# EAGLE board 555_led_pcb (EAGLE 7.2.0)
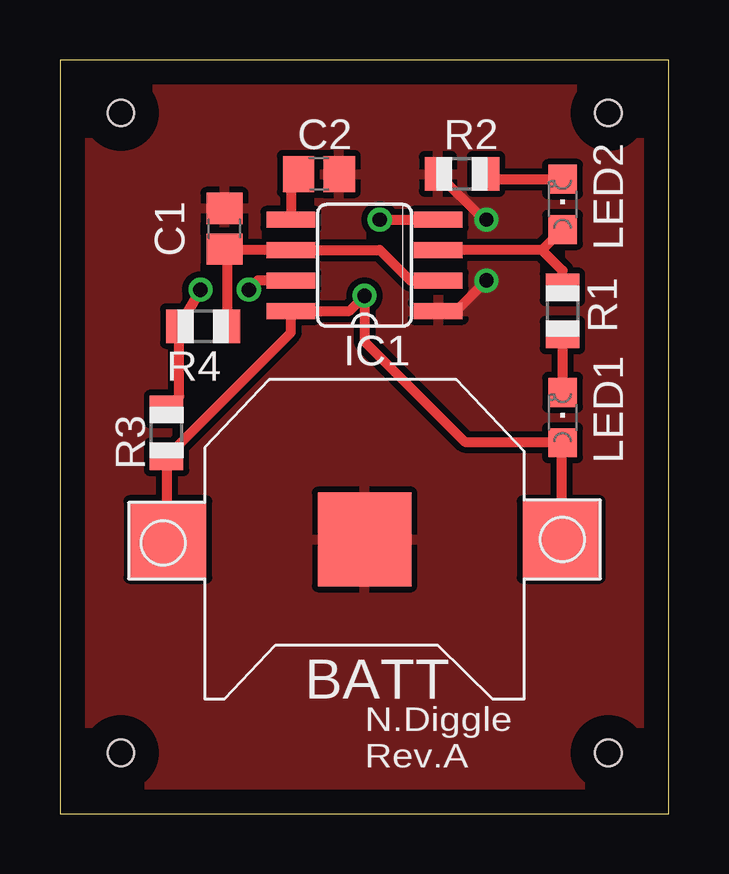
[diagram p0: board, top side]
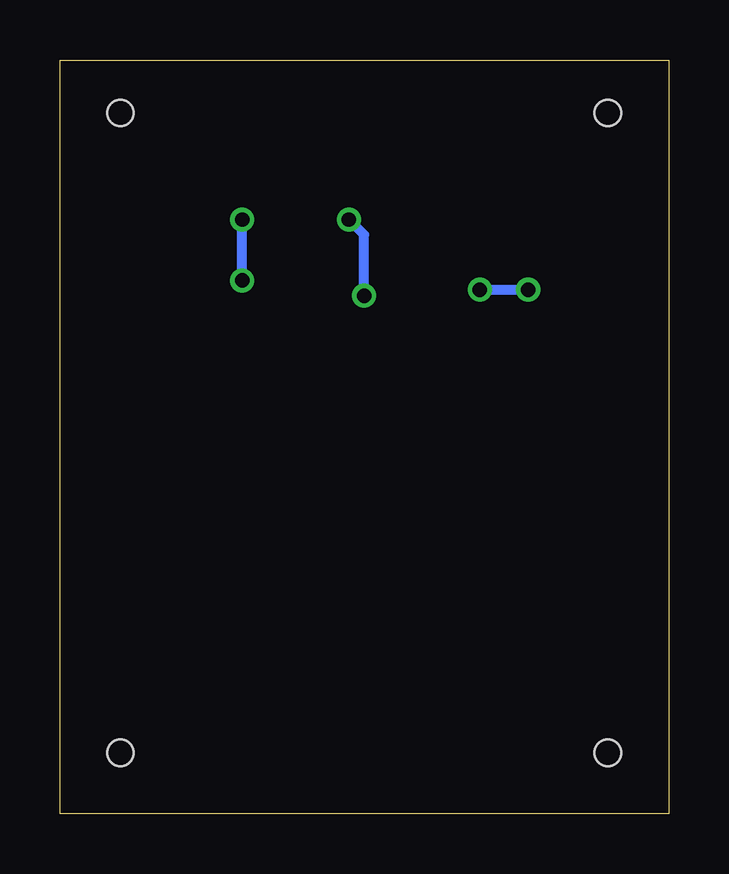
[diagram p1: board, bottom side, seen from below]

Size 25.38 x 31.42 mm. Coordinates in mm from the lower left corner, seen from the top.
Outline: 0,0 25.38,0 25.38,31.42 0,31.42 0,0
Copper layers (1*16): Top 0.035mm / dielectric 1.5mm / Bottom 0.035mm
Design rules "default": minimum track width 10mil, minimum drill 24mil, track to track 8mil, track to pad 8mil, pad to pad 8mil, via to via 8mil, smd to smd 8mil, copper to edge 40mil, drill to drill 8mil, minimum pad ring 10mil, minimum via ring 8mil, stop-mask expansion 4mil, vias tented up to drill 0mil, thermal gap 10mil
Net classes: 0 default: width 0.305 mm, drill 0.508 mm, clearance 0.254 mm
Holes 1.1 mm at 2.54,2.54 22.86,2.54 22.86,29.21 2.54,29.21

## Footprints (pad centres in the part's own frame; a part is rotated, then mirrored left to right if it is on the bottom)
CR1220-SMD = smd 3.2 x 3.2: +$1 -8.2,0; +$2 8.2,0 | smd 3.9 x 3.9: - 0,0
C0805 = smd 1.3 x 1.5: 1 -0.85,0; 2 0.85,0
SO08 = smd 0.66 x 2.032: 1 -1.905,-3.073; 2 -0.635,-3.073; 3 0.635,-3.073; 4 1.905,-3.073; 5 1.905,3.073; 6 0.635,3.073; 7 -0.635,3.073; 8 -1.905,3.073
CHIPLED_0805 = smd 1.2 x 1.2: A 0,-1.05; C 0,1.05
R0805 = smd 1.1 x 1.4: 1 -1,0; 2 1,0

## Placement (x,y rotation side)
BATT  CR1220  [CR1220-SMD]  12.7,11.43 180 top
C1  22uF  [C0805]  6.86,24.38 90 top
C2  0.01uF  [C0805]  10.79,26.67 0 top
IC1  LM555D  [SO08]  12.7,22.86 90 top
LED1  Green  [CHIPLED_0805]  20.95,16.51 0 top
LED2  Green  [CHIPLED_0805]  20.95,25.4 0 top
R1  100  [R0805]  20.95,20.95 270 top
R2  100  [R0805]  16.76,26.67 0 top
R3  1k  [R0805]  4.45,15.88 270 top
R4  100k  [R0805]  5.97,20.32 180 top

## Library data of the parts
BATT = adafruit; MF: KEYSTONE ELECTR; MPN: 3000; OC_NEWARK: 66F5622
C1 = adafruit; MPN: 0603B224K160CT; OC_NEWARK: 77Y8088
C2 = adafruit; MPN: C0805C103KCRACTU; OC_NEWARK: 76Y2948
IC1 = adafruit; MPN: TLC555QDRQ1; OC_NEWARK: 06X1018
LED1 LED2 = adafruit; MF: LUMEX INC.; MPN: SSL-LX5093GT; OC_NEWARK: 09J9308
R1 R2 = adafruit; MF: VISHAY/DALE; MPN: CRCW060310K0JNEA; OC_NEWARK: 52K8066
R3 = adafruit; MF: VISHAY/DALE; MPN: CRCW08051K00FKTA; OC_NEWARK: 05F1507
R4 = adafruit; MPN: NTCS0805E3104JMT; OC_NEWARK: 24W6598

## Nets
GND: BATT.- C1.2 C2.2 IC1.1 R2.1
N$1: LED1.C R1.2
N$2: IC1.3 LED2.A R1.1
N$3: LED2.C R2.2
N$4: IC1.7 R3.1 R4.2
N$8: C2.1 IC1.5
NEW1: C1.1 IC1.2 IC1.6 R4.1
VCC: BATT.+$1 BATT.+$2 IC1.4 IC1.8 LED1.A R3.2

## Tracks (layer width: path | path; a pad name or v marks a point on that pad's centre or on a via)
GND  (via drill 0.6)
  Top 0.406: IC1.1 16.51,20.95 v17.78,22.23 | v17.78,24.77 17.67,24.77 R2.1
  Bottom 0.406: v17.78,22.23 v17.78,24.77
  pour Top: -1.02,32.26 -1.02,-1.02 25.91,-1.02 25.91,32.26
N$1
  Top 0.406: R1.2 LED1.C
N$2
  Top 0.406: LED2.A 20.1,23.5 | 20.1,23.5 IC1.3 | R1.1 20.95,22.64 20.1,23.5
N$3
  Top 0.406: R2.2 17.98,26.45 LED2.C
N$4  (via drill 0.6)
  Top 0.406: R3.1 4.97,17.4 R4.2 v5.86,21.84 | IC1.7 8.26,22.23 v7.87,21.84
  Bottom 0.406: v7.87,21.84 v5.86,21.84
N$8
  Top 0.406: C2.1 9.63,26.35 IC1.5
NEW1
  Top 0.406: R4.1 6.97,23.42 C1.1 6.9,23.5 IC1.6 13.34,23.5 14.61,22.23 IC1.2
VCC  (via drill 0.6)
  Top 0.406: BATT.+$2 4.45,11.48 R3.2 9.63,20.06 IC1.8 12.06,20.95 v12.7,21.59 12.7,19.68 16.89,15.49 20.92,15.49 LED1.A 20.9,15.4 BATT.+$1 | v13.34,24.77 IC1.4
  Bottom 0.406: v12.7,21.59 12.7,24.13 v13.34,24.77

## Text on the board
tPlace: N.Diggle / Rev.A